# Altium PCB PCB1.PcbDoc
Units mm, origin at the board's own origin, x right, y up, seen from the top; angles counter-clockwise.
Board outline 21 x 22.5 mm, 2 copper layers (Top Layer, Bottom Layer); 3 components, 3 nets, 8 pads, 2 vias.
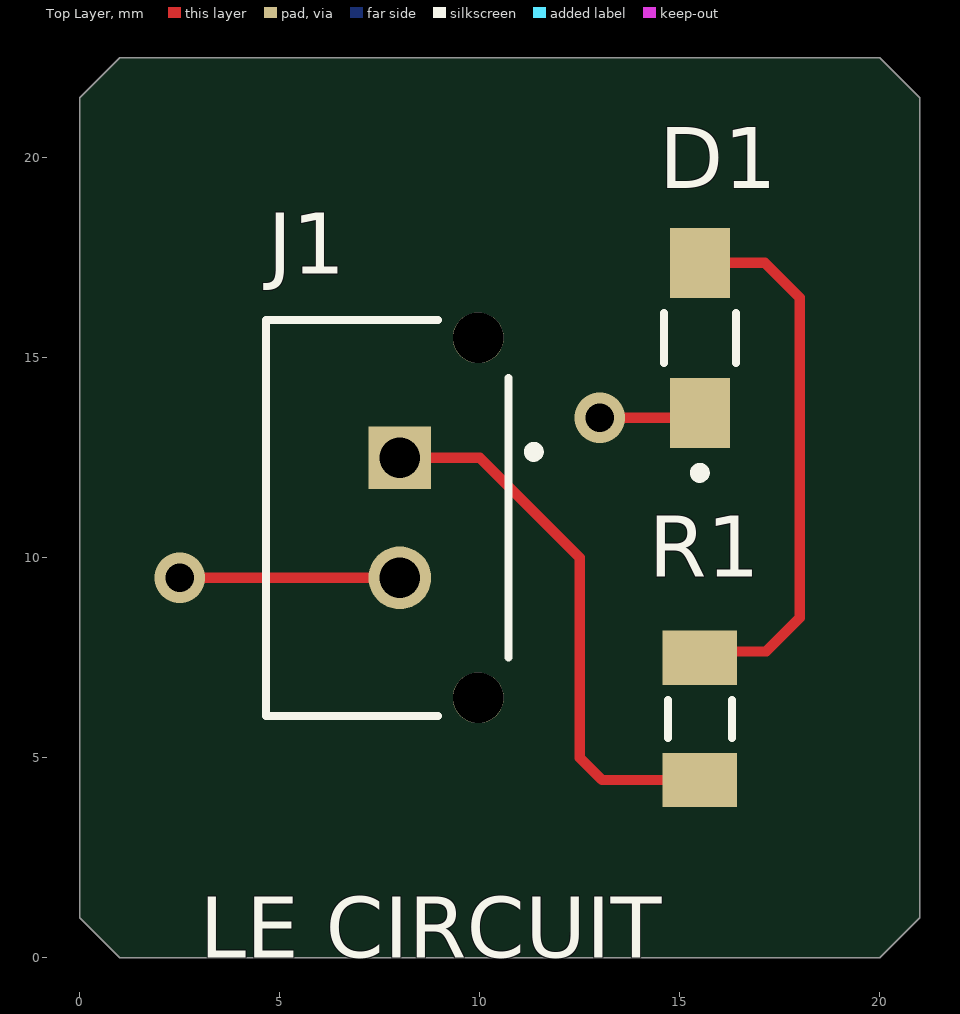
[diagram p0: Top Layer view]
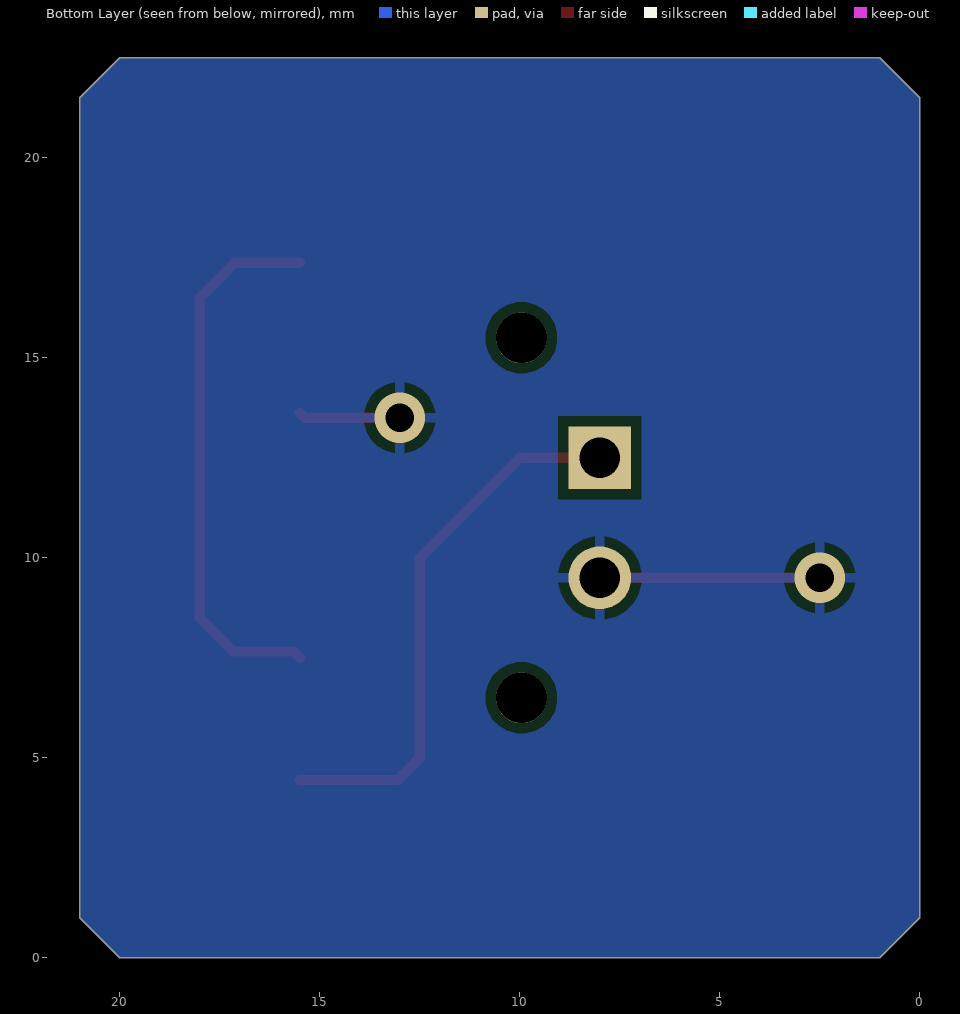
[diagram p1: Bottom Layer view, seen from below]
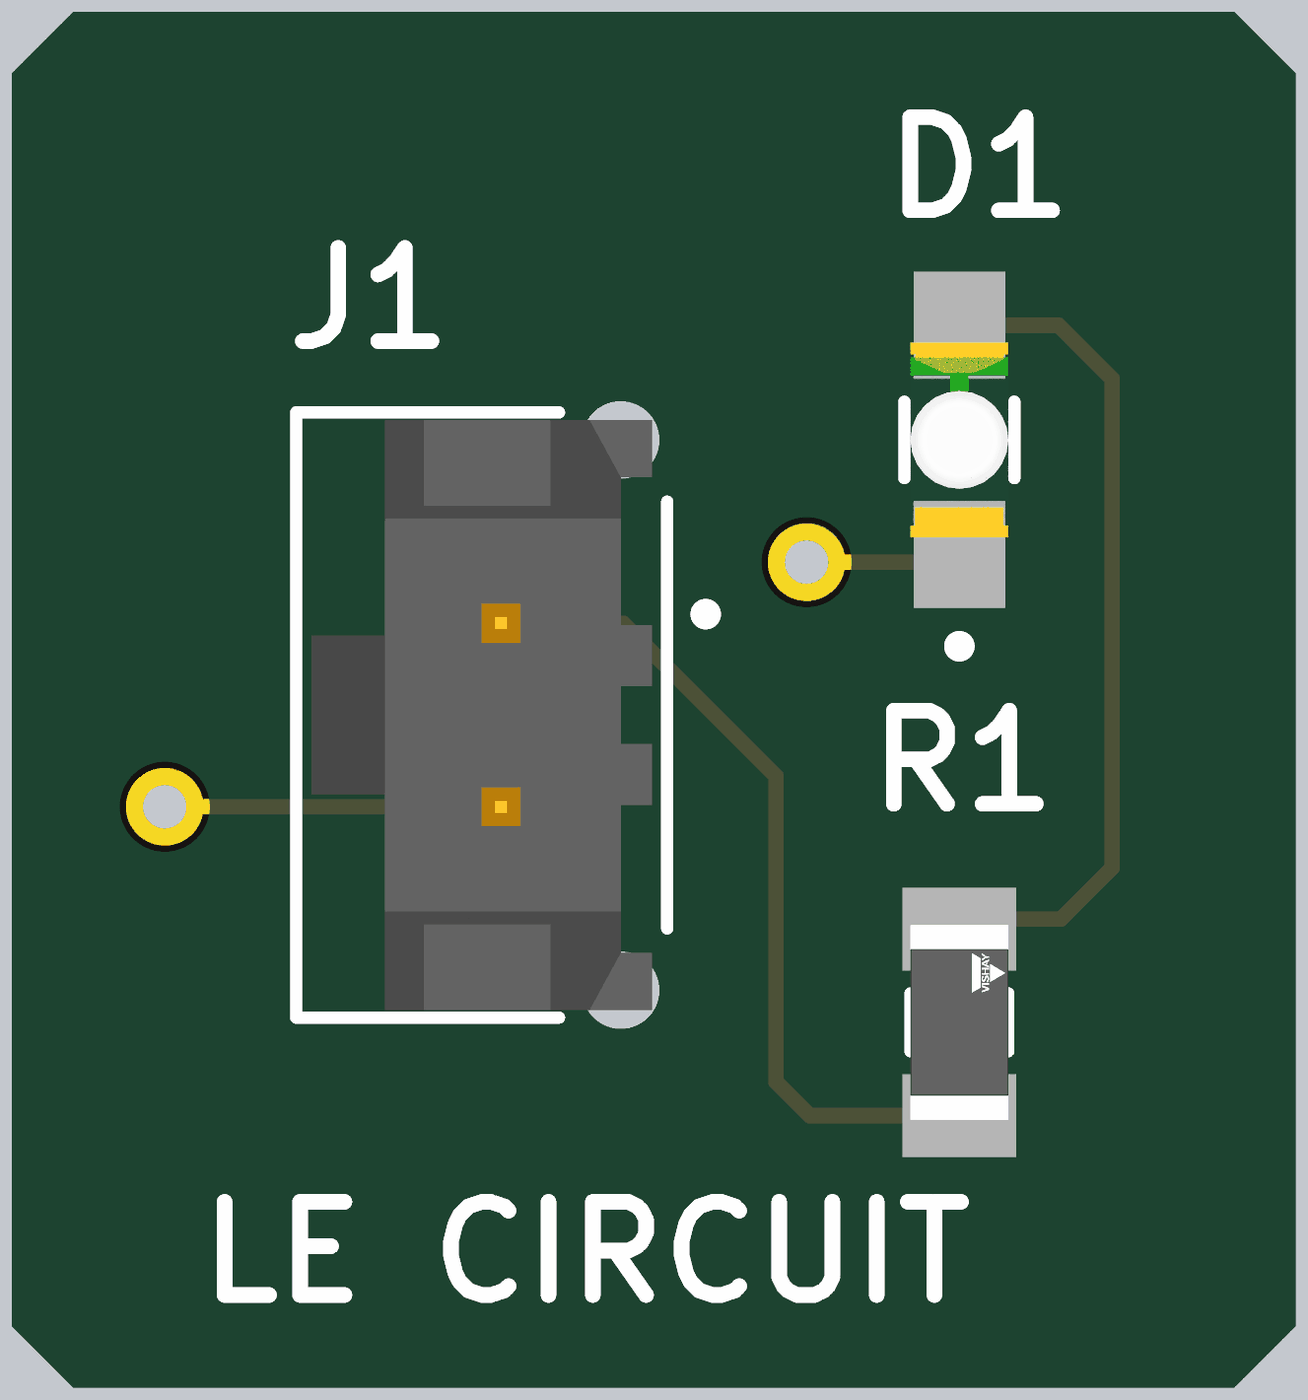
[diagram p2: 3D render of the assembled board from above, using the file's embedded part models]

## Layer stack, top to bottom
Top Solder: solder mask 0.0102, Solder Resist, Dk 3.5
Top Layer: signal copper 0.0356
Dielectric 1: dielectric 0.32, FR-4, Dk 4.8
Bottom Layer: signal copper 0.0356
Bottom Solder: solder mask 0.0102, Solder Resist, Dk 3.5

## Board outline
0,1 1,0 20,0 21,1 21,21.5 20,22.5 1,22.5 0,21.5

## Design rules (kind name [scope] priority, off if disabled: settings)
Clearance [All] p1: gap=0.254 ignorepadtopadclearanceinfootprint=FALSE
PolygonConnect [All] p1: connectstyle=Relief reliefconductorwidth=0.254 reliefentries=4 polygonreliefangle="90 Angle" airgapwidth=0.254
RoutingVias [All] p1: holewidth=0.711 width=1.27 viastyle="Through Hole" minholewidth=0.711 minwidth=1.27 maxholewidth=0.711 maxwidth=1.27
SolderMaskExpansion [All] p1: expansion=0.102 istentingtop=FALSE
SupplyNets "Schematic Supply Nets_1" [InNet('GND')] p1: voltage=0.000
SupplyNets "Schematic Supply Nets" [InNet('5V')] p2: voltage=0.000
Width [All] p1: maxlimit=1 minlimit=0.254 preferedwidth=0.254
30 further rules are at their usual default settings.

## Components (designator, comment, footprint, x,y, rotation, side; value= is the part's Value field where it differs from the comment)
D1 "APTD3216CGCK" FP-APTD3216CGCK-MFG 15.5,15.5 r90 top
J1 "43650-0228" FP-436500228-MFG 7.685,11 r90 top
R1 "CRCW1206300RFKEA" FP-CRCW1206-e3-IPC_A 15.5,5.974 r90 top

## Footprints (in the part's own frame and the unit in brackets; to place one, negate y for a bottom-side part, rotate by r counter-clockwise, add the part's x,y. Pads: shape width x height; smd on the part's side, far side on the other; paste and mask are expansions set on the pad)
FP-436500228-MFG [mm]
  rect 1.57x1.57 hole 1.02 paste-2539.97 mask+0: 1(1.5,-0.315)
  round 1.57 hole 1.02 paste-2539.97 mask+0: 2(-1.5,-0.315)
  round 1.27 hole 1.27 unplated paste-2539.97 mask+0: ""(-4.5,-2.275) ""(4.5,-2.275)
  silkscreen extent -4.95,-3.79 4.95,3.04, body extent -5.24,-3.14 5.24,3.14, height 0.25
FP-APTD3216CGCK-MFG [mm]
  rect 1.75x1.5 smd paste+0 mask+0: 1(-1.875,0) 2(1.875,0)
  silkscreen extent -3.5,-0.9 0.63,0.9, body extent -2.85,-1 2.85,1, height 0.25
FP-CRCW1206-e3-IPC_A [mm]
  rect 1.356x1.858 smd paste+0 mask+0: 1(-1.526,0) 2(1.526,0)
  silkscreen extent -0.47,-0.8 0.47,0.8, body extent -2.7,-1.43 2.7,1.43, height 0.25

## Part data
D1: library part CMP-2000-05792-2, "LED GREEN CLEAR 2SMD", Case Code (Imperial)=1206, Case Code (Metric)=3216, Color=Green, Forward Current=20mA, Forward Voltage=2.1V, Lens Color=Clear, Max Operating Temperature=85°C, Min Operating Temperature=-40°C, Package Quantity=2000, Case/Package=1206, Dominant Wavelength=570nm, Height=1.8mm, Illumination Color=Green, Lead Free="Lead Free", Length=3.2mm, Lens Style=Clear, Luminous Intensity=300mcd, Mount="Surface Mount", Number of LEDs=1, Number of Pins=2, Packaging="Tape and Reel", Test Current=20mA, Viewing Angle=50°, Width=1.6mm
J1: library part CMP-04776-000607-2, "CONN HEADER VERT 2POS 3MM", Current Rating=5A, Manufacturer Lifecycle Status=ACTIVE, Max Operating Temperature=125°C, Min Operating Temperature=-40°C, Voltage Rating=250V, Contact Material=Brass, Contact Plating=Gold, Country of Origin=US, Glow Wire Compliant=Compliant, Halogen Free="Low Halogen", Height=10.15mm, Housing Material=Thermoplastic, Lifecycle Status=Production, NexarPartId=7647538, Number of Circuits=2, Number of Contacts=2, Number of Pins=2, Number of Positions=2, Number of Rows=1, Orientation=Vertical, Pitch=3mm, Plating=Tin, RoHS=Compliant, Schedule B=8536694040, Termination="Through Hole"
R1: library part CMP-1014-00449-3, "RES Thick Film, 300Ω, 1%, 0.25W, 100ppm/°C, 1206", Case Code (Imperial)=1206, Case Code (Metric)=3216, Max Operating Temperature=155°C, Max Power Dissipation=250mW, Min Operating Temperature=-55°C, Package Quantity=10, Resistance=300R, Temperature Coefficient=100ppm/°C, Tolerance=1%, Voltage Rating=200V, Case/Package=1206, Composition="Thick Film", Contact Plating=Tin, Depth=1.6mm, Features="Automotive AEC-Q200", Height=0.55mm, Lead Free="Lead Free", Length=3.2mm, Military Standard=Not, Mount="Surface Mount", Number of Terminations=2, Packaging="Tape and Reel", Power Rating=250mW, Radiation Hardening=No, Termination=SMD/SMT, Voltage Rating (DC)=200V, Weight=0.000353oz, Width=0.063inch, Working Voltage=200V

## Via types
v1: diameter 1.27, hole 0.711, Top Layer to Bottom Layer, 2 vias

## Nets (pads, with @x,y where several pads share a name; then routed paths per layer and width w, separated by ;. In a path a pad name is that pad's centre, name@x,y a point inside that pad or via, vN(x,y) a via of type N, cw(c..) or ccw(c..) an arc to the next point about the centre after c; other vN are vias at no path point)
5V: J1.1 R1.1 | length 13.8
  Top Layer w0.254: J1.1 10,12.5 12.5,10 12.5,5 13.052,4.448 R1.1
GND: D1.1 J1.2 | length 8.1
  Top Layer w0.254: v1(2.5,9.5) J1.2 ; v1(13,13.5) 15.375,13.5 D1.1
NetD1_2: D1.2 R1.2 | length 13.8
  Top Layer w0.254: R1.2 15.661,7.661 17.161,7.661 18,8.5 18,16.5 17.125,17.375 D1.2
pads on no net: J1.

## Polygon pours and split planes (outlines as drawn)
GND on Bottom Layer "GND_L02_P001" (solid, pour order 1): 1,0 0,1 0,21.5 1,22.5 20,22.5 21,21.5 21,1 20,0

## Silkscreen, mask and mechanical layers (free items; w line width, h text height)
Top Overlay:
  text "LE CIRCUIT" at 3,0 h1.52
Mechanical 1:
  the board outline again, w0.254